# EAGLE board motoresT1 (EAGLE 9.6.2)

Size 102.54 x 92.7 mm. Coordinates in mm from the lower left corner, seen from the top.
Outline: 0,0 102.54,0 102.54,92.7 0,92.7 0,0
Copper layers (1*16): Top 0.035mm / dielectric 1.5mm / Bottom 0.035mm
Design rules "default": minimum track width 6mil, minimum drill 0.35mm, track to track 6mil, track to pad 6mil, pad to pad 6mil, via to via 6mil, smd to smd 6mil, copper to edge 40mil, drill to drill 6mil, minimum pad ring 10mil, minimum via ring 8mil, stop-mask expansion 4mil, vias tented up to drill 0mil, thermal gap 10mil
Net classes: 0 default: width 0.508 mm, clearance 0.5 mm; 1 corrente: width 1.016 mm, clearance 0.5 mm

## Footprints (pad centres in the part's own frame; a part is rotated, then mirrored left to right if it is on the bottom)
1X03 = drill 1.016: 1 -2.54,0; 2 0,0; 3 2.54,0
DCJACK_2MM_PTH = drill 2.8: GND 0,7.35; GNDBREAK 4.8,10.75 | drill 3.2: PWR 0,13.6
1X04-BIG = drill 1.016 pad 1.778: 1 0,0; 2 2.54,0; 3 5.08,0; 4 7.62,0
1X01 = drill 1.016 pad 1.93 octagon: 1 0,0
MEGA_ARDUINO_1 = drill 1.016 long: 1 33.02,2.54; 2 35.56,2.54; 3 38.1,2.54; 4 40.64,2.54; 5 43.18,2.54; 6 45.72,2.54; 7 50.8,2.54; 8 53.34,2.54; 9 55.88,2.54; 10 58.42,2.54; 11 60.96,2.54; 12 63.5,2.54; 13 66.04,2.54; 14 68.58,2.54; 15 73.66,2.54; 16 76.2,2.54; 17 78.74,2.54; 18 81.28,2.54; 19 83.82,2.54; 20 86.36,2.54; 21 88.9,2.54; 22 91.44,2.54; 23 86.36,50.8; 24 83.82,50.8; 25 81.28,50.8; 26 78.74,50.8; 27 76.2,50.8; 28 73.66,50.8; 29 71.12,50.8; 30 68.58,50.8; 31 63.5,50.8; 32 60.96,50.8; 33 58.42,50.8; 34 55.88,50.8; 35 53.34,50.8; 36 50.8,50.8; 37 48.26,50.8; 38 45.72,50.8; 39 41.91,50.8; 40 39.37,50.8; 41 36.83,50.8; 42 34.29,50.8; 43 31.75,50.8; 44 29.21,50.8; 45 26.67,50.8; 46 24.13,50.8 | drill 1.016 octagon: 47 93.98,50.8; 48 96.52,50.8; 49 93.98,48.26; 50 96.52,48.26; 51 93.98,45.72; 52 96.52,45.72; 53 93.98,43.18; 54 96.52,43.18; 55 93.98,40.64; 56 96.52,40.64; 57 93.98,38.1; 58 96.52,38.1; 59 93.98,35.56; 60 96.52,35.56; 61 93.98,33.02; 62 96.52,33.02; 63 93.98,30.48; 64 96.52,30.48; 65 93.98,27.94; 66 96.52,27.94; 67 93.98,25.4; 68 96.52,25.4; 69 93.98,22.86; 70 96.52,22.86; 71 93.98,20.32; 72 96.52,20.32; 73 93.98,17.78; 74 96.52,17.78; 75 93.98,15.24; 76 96.52,15.24; 77 93.98,12.7; 78 96.52,12.7; 79 93.98,10.16; 80 96.52,10.16; 81 93.98,7.62; 82 96.52,7.62 | hole 3.2: 15.24,50.8; 15.24,2.54; 90.17,50.8; 96.52,2.54 | hole 2: 74.168,27.94

## Placement (x,y rotation side)
BDIR  [1X03]  50.8,81.28 0 top
BESQ  [1X03]  50.8,63.5 0 top
CONN_MOTORS  [DCJACK_2MM_PTH]  0,66.04 270 top
CONN_SERIAL  1X4-BIG  [1X04-BIG]  92.71,73.66 180 top
CONN_TELAS  [DCJACK_2MM_PTH]  0,82.55 270 top
JP1  [1X01]  26.67,80.01 90 top
JP2  [1X01]  26.67,82.55 90 top
MEGA  [MEGA_ARDUINO_1]  0,2.54 0 top
PHOR  [1X03]  40.64,71.12 90 top
PVERT  [1X03]  27.94,71.12 180 top
TRONCO  [1X03]  63.5,71.12 90 top

## Library data of the parts
BDIR BESQ CONN_MOTORS CONN_SERIAL CONN_TELAS JP1 JP2 PHOR PVERT TRONCO = adafruit
MEGA = arduino

## Nets
+3V3: MEGA.2
+5V: MEGA.3 MEGA.47 MEGA.48
+VIN: MEGA.6
GND: BDIR.3 BESQ.3 CONN_MOTORS.GND CONN_TELAS.GND JP1.1 MEGA.4 MEGA.5 MEGA.45 MEGA.81 MEGA.82 PHOR.3 PVERT.3 TRONCO.3
GNDBREAK: CONN_MOTORS.GNDBREAK CONN_TELAS.GNDBREAK
N$1: BDIR.1 MEGA.37
N$2: MEGA.38 TRONCO.1
N$4: MEGA.39 PHOR.1
N$5: MEGA.40 PVERT.1
N$6: BESQ.1 MEGA.36
RX0: CONN_SERIAL.3 MEGA.31
RX1: CONN_SERIAL.1 MEGA.25
TX0: CONN_SERIAL.4 MEGA.32
TX1: CONN_SERIAL.2 MEGA.26
VCC1 [corrente]: BDIR.2 BESQ.2 CONN_MOTORS.PWR PHOR.2 PVERT.2 TRONCO.2
VCC2 [corrente]: CONN_TELAS.PWR JP2.1

## Tracks (layer width: path | path; a pad name or v marks a point on that pad's centre or on a via)
+5V  (2 unrouted)
GND  (12 unrouted)
GNDBREAK  (1 unrouted)
N$1  (1 unrouted)
N$2  (1 unrouted)
N$4  (1 unrouted)
N$5  (1 unrouted)
N$6  (1 unrouted)
RX0  (1 unrouted)
RX1  (1 unrouted)
TX0  (1 unrouted)
TX1  (1 unrouted)
VCC1  (5 unrouted)
VCC2  (1 unrouted)

## Text on the board
Top: GND VCC | 6 VCC GND | GND VCC 9 | 8 VCC GND | 7 VCC GND | 5 VCC GND
Bottom: RX1 TX1 RX0 TX0